# Altium PCB PCB1.PcbDoc
Units mm, origin at the board's own origin, x right, y up, seen from the top; angles counter-clockwise.
Board outline 30.73 x 48.39 mm, 2 copper layers (Top Layer, Bottom Layer); 86 components, 83 nets, 340 pads, 0 vias.
Unrouted connection lines stored in the file: 221.
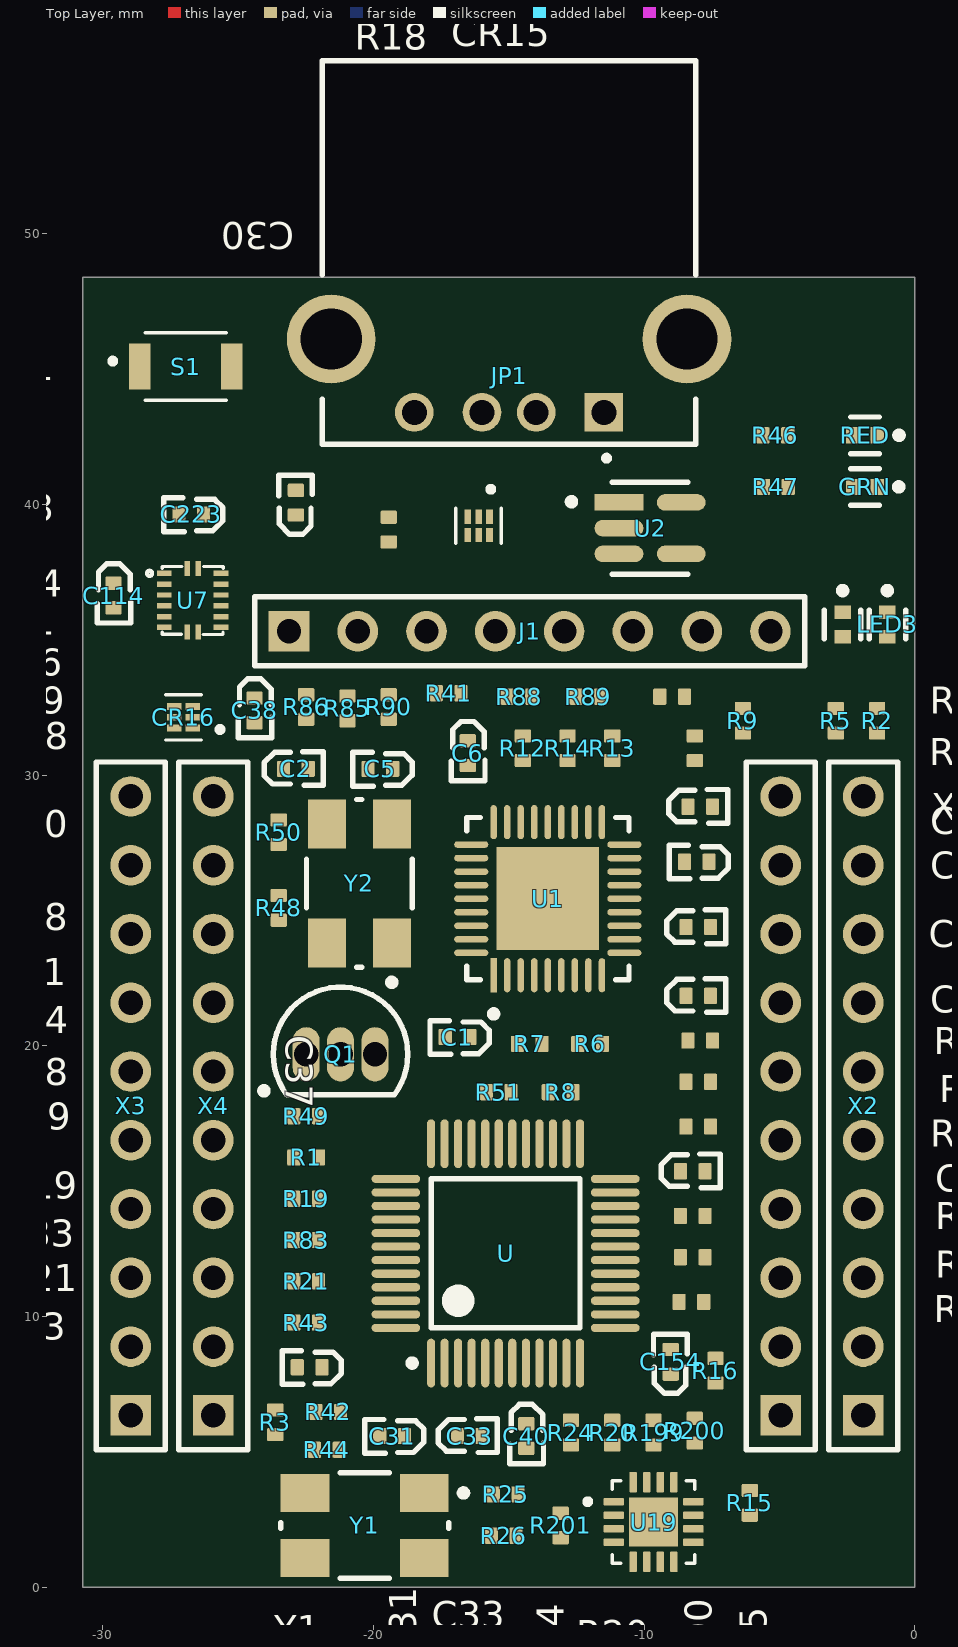
[diagram p0: Top Layer view]
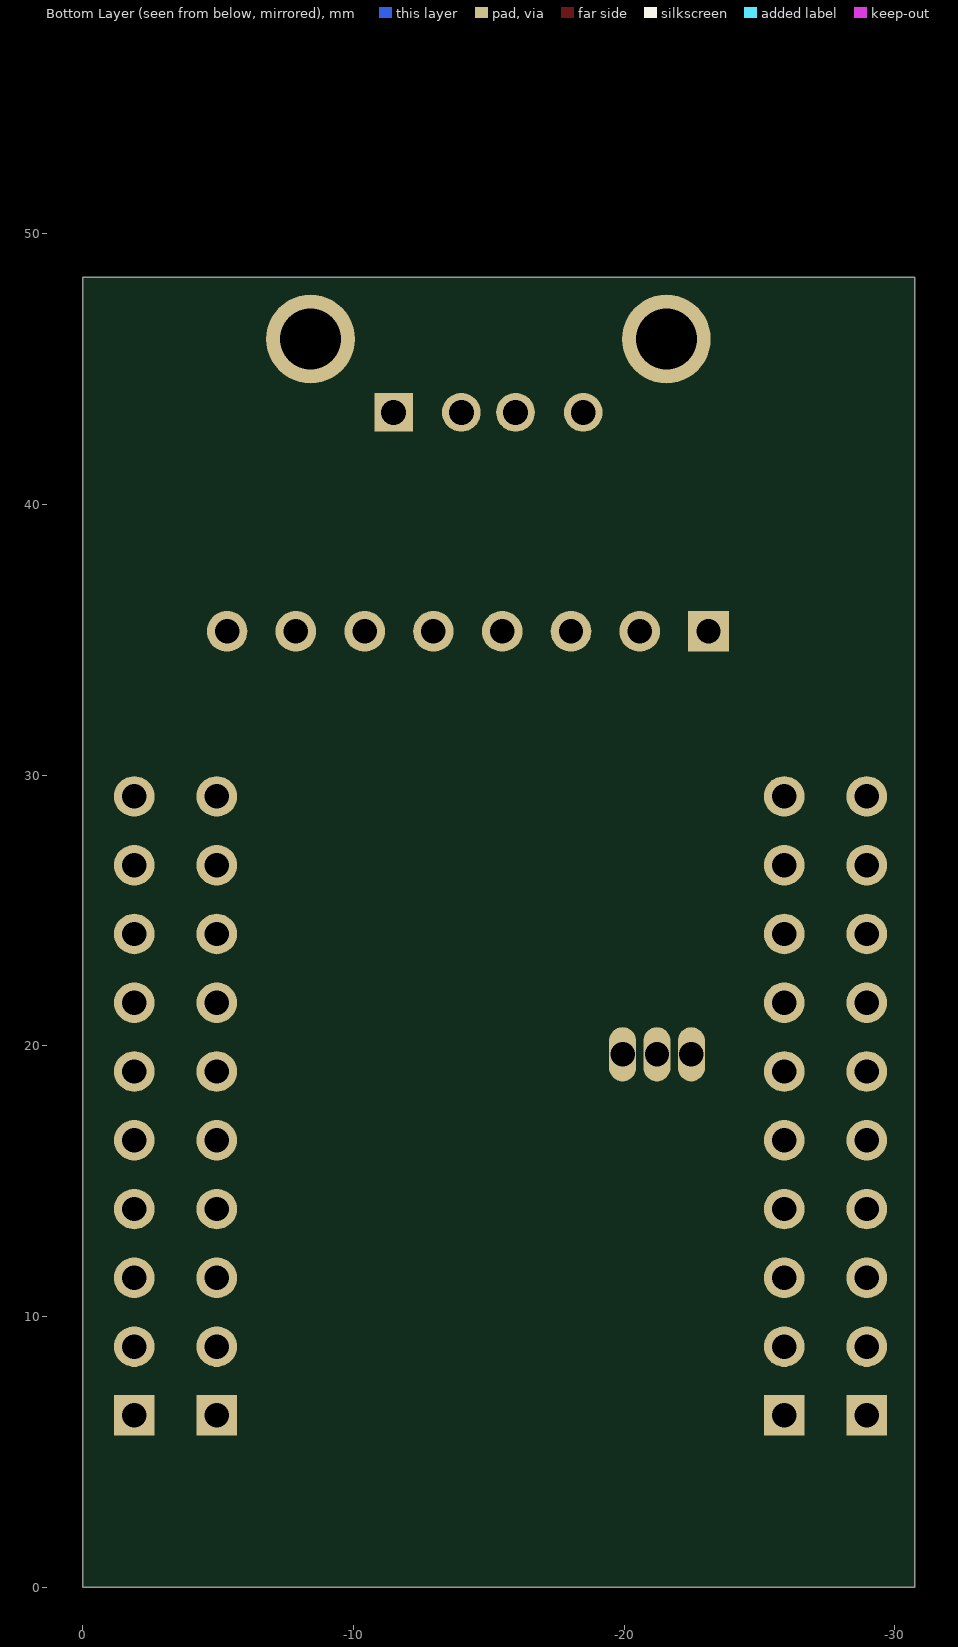
[diagram p1: Bottom Layer view, seen from below]

## Layer stack, top to bottom
Top Solder: solder mask 0.0102, Solder Resist, Dk 3.5
Top Layer: signal copper 0.0356
Dielectric 1: dielectric 0.32, FR-4, Dk 4.8
Bottom Layer: signal copper 0.0356
Bottom Solder: solder mask 0.0102, Solder Resist, Dk 3.5

## Board outline
-30.734,0 -30.734,48.387 0,48.387 0,0

## Design rules (kind name [scope] priority, off if disabled: settings)
Clearance Clearance_1 [All] p1: gap=0.15 ignorepadtopadclearanceinfootprint=FALSE
Clearance [All] p2: gap=0.2 ignorepadtopadclearanceinfootprint=FALSE
PolygonConnect [All] p1: connectstyle=Relief reliefconductorwidth=0.254 reliefentries=4 polygonreliefangle="90 Angle" airgapwidth=0.254
RoutingVias [All] p1: holewidth=0.711 width=1.27 viastyle="Through Hole" minholewidth=0.711 minwidth=1.27 maxholewidth=0.711 maxwidth=1.27
SolderMaskExpansion [All] p1: expansion=0.102 istentingtop=FALSE
Width [All] p1: maxlimit=0.254 minlimit=0.254 preferedwidth=0.254
30 further rules are at their usual default settings.

## Classes and differential pairs
component class Sheet4: C154 R1 R3 R4 R15 R16 R25 R26 R199 R200 R201 U19
component class Sheet3: C1 C2 C3 C4 C5 C6 C7 C8 R7 R9 R10 R11 R12 R13 R14 U1 U2 Y2
component class Sheet2: " " C30 C31 C33 C37 C38 C39 C40 CR16 GRN Q1 R6 R8 R18 R19 R20 R21 R22 R24 R41 R42 R43 R44 R46 R47 R48 R49 R50 R51 R83 R84 R85 R86 R88 R89 R90 R92 RED S1 U Y1
component class Sheet1: C114 C223 CR15 J1 JP1 LED3 LED4 R2 R5 R17 R23 U7 X1 X2 X3 X4

## Components (designator, comment, footprint, x,y, rotation, side; value= is the part's Value field where it differs from the comment)
C1 "Cap" CAPC1005X35N -16.891,20.32 r0 top value=18pF
C2 "Cap" CAPC1005X35N -22.86,30.226 r180 top value=18pF
C3 "Cap" CAPC1005X35N -8.054,26.797 r0 top value=1uF
C4 "Cap" CAPC1005X35N -8.001,21.844 r180 top value=1uF
C5 "Cap" CAPC1005X35N -19.738,30.226 r0 top value=1uF
C6 "Cap" CAPC1005X35N -16.51,30.808 r90 top value=1uF
C7 "Cap" CAPC1005X35N -8.001,24.384 r180 top value=1uF
C8 "Cap" CAPC1005X35N -7.927,28.829 r180 top value=1uF
C30 "Cap" CAPC1005X35N -22.86,40.058 r270 top value=1uF
C31 "Cap" CAPC1005X35N -19.304,5.588 r0 top value=15pF
C33 "Cap" CAPC1005X35N -16.436,5.588 r180 top value=15pF
C37 "Cap" CAPC1005X35N -22.352,8.128 r0 top value=1uF
C38 "Cap" CAPC1005X35N -24.384,32.385 r90 top value=1uF
C39 "Cap" CAPC1005X35N -8.202,15.367 r180 top value=1uF
C40 "Cap" CAPC1005X35N -14.351,5.588 r90 top value=1uF
C114 "6.3V" CAPC1005X35N -29.591,36.629 r90 top value=10uF
C154 "Cap" CAPC1005X35N -9.017,8.329 r270 top value=0.01uF
C223 "6.3V" CAPC1005X35N -26.723,39.624 r0 top value=2.2uF
CR15 "HSP061-2M6" PSON40P120X130X55-6N -16.11,39.202 r270 top
CR16 "HSP061-2M6" PSON40P120X130X55-6N -27.01,32.131 r180 top
GRN "LED2" FP-SML-P11MTT86-MFG -1.847,40.64 r180 top
J1 "8 PIN HDR" HDR1X8 -23.114,35.306 r0 top
JP1 "JP1" GCT_USB1130-15-A_REVA -14.986,46.101 r180 top
LED3 "LED0" FP-SML-P11MTT86-MFG -1.016,35.56 r270 top
LED4 "LED0" FP-SML-P11MTT86-MFG -2.667,35.56 r270 top
Q1 "2N3904" TO-92A -21.209,19.685 r270 top
R1 "Res1" RESC1005X35N -22.479,15.875 r0 top value=0
R2 "Res1" RESC1005X35N -1.397,32.004 r90 top value=110
R3 "Res1" RESC1005X35N -23.622,6.096 r270 top value=0
R4 "Res1" RESC1005X35N -7.927,20.193 r180 top value=0
R5 "Res1" RESC1005X35N -2.921,32.004 r90 top value=110
R6 "Res1" RESC1005X35N -11.991,20.066 r180 top value=0
R7 "Res1" RESC1005X35N -14.224,20.066 r0 top value=12K
R8 "Res1" RESC1005X35N -13.081,18.288 r180 top value=0
R9 "Res1" RESC1005X35N -6.35,32.004 r90 top value=0
R10 "Res1" RESC1005X35N -8.128,30.988 r90 top value=0
R11 "Res1" RESC1005X35N -8.964,32.893 r0 top value=100k
R12 "Res1" RESC1005X35N -14.478,30.988 r90 top value=100k
R13 "Res1" RESC1005X35N -11.176,30.988 r90 top value=100k
R14 "Res1" RESC1005X35N -12.827,30.988 r90 top value=100k
R15 "Res1" RESC1005X35N -6.096,3.122 r270 top value=0
R16 "Res1" RESC1005X35N -7.366,8.001 r270 top value=0
R17 "Res1" RESC1005X35N -8.001,18.669 r180 top value=0
R18 "Res1" RESC1005X35N -19.431,39.063 r90 top value=100k
R19 "Res1" RESC1005X35N -22.479,14.351 r180 top value=2.7K
R20 "Res1" RESC1005X35N -11.176,5.715 r270 top value=4.7K
R21 "Res1" RESC1005X35N -22.479,11.303 r180 top value=0
R22 "Res1" RESC1005X35N -8.202,13.716 r0 top value=1.5K
R23 "Res1" RESC1005X35N -8.001,17.018 r180 top value=0
R24 "Res1" RESC1005X35N -12.7,5.715 r90 top value=4.7K
R25 "Res1" RESC1005X35N -15.113,3.429 r0 top value=10K
R26 "Res1" RESC1005X35N -15.187,1.905 r0 top value=10K
R41 "Res1" RESC1005X35N -17.219,33.02 r180 top value=100
R42 "Res1" RESC1005X35N -21.664,6.477 r180 top value=10K
R43 "Res1" RESC1005X35N -22.479,9.779 r0 top value=100K
R44 "Res1" RESC1005X35N -21.717,5.08 r180 top value=10K
R46 "Res1" RESC1005X35N -5.154,42.545 r180 top value=100
R47 "Res1" RESC1005X35N -5.133,40.64 r180 top value=100
R48 "Res1" RESC1005X35N -23.495,25.093 r270 top value=10K
R49 "Res1" RESC1005X35N -22.479,17.399 r0 top value=100
R50 "Res1" RESC1005X35N -23.495,27.887 r270 top value=33K
R51 "Res1" RESC1005X35N -15.367,18.288 r180 top value=1.5k
R83 "Res1" RESC1005X35N -22.479,12.827 r0 top value=0
R84 "Res1" RESC1005X35N -8.202,12.192 r180 top value=0
R85 "Res1" RESC1005X35N -20.955,32.459 r270 top value=0
R86 "Res1" RESC1005X35N -22.479,32.512 r270 top value=0
R88 "Res1" RESC1005X35N -14.605,32.893 r0 top value=1K
R89 "Res1" RESC1005X35N -12.065,32.893 r180 top value=1K
R90 "Res1" RESC1005X35N -19.431,32.512 r90 top value=1K
R92 "Res1" RESC1005X35N -8.255,10.541 r0 top value=1K
R199 "Res1" RESC1005X35N -9.652,5.715 r90 top value=0
R200 "Res1" RESC1005X35N -8.128,5.789 r90 top value=0
R201 "Res1" RESC1005X35N -13.081,2.286 r270 top value=10K
RED "LED1" FP-SML-P11MTT86-MFG -1.836,42.545 r180 top
S1 "sw" SW_B3U-1000P -26.924,45.085 r0 top
U "STM32F103CBT6" STM-LQFP48_N -15.117,12.333 r90 top
U1 "USB2534I-1080AEN" FP-36SQFN-3706-6x6B-IPC_A -13.556,25.432 r90 top
U2 "usb2" FP-DBV0005A-IPC_A -9.779,39.116 r0 top
U7 "EP5358HUI" QFN40P225X250X110-16N -26.67,36.449 r0 top
U19 "" QFN50P300X300X90-17N -9.652,2.413 r0 top
X1 "SOC 10" HDR1X10 -4.953,6.35 r90 top
X2 "SOC 10" HDR1X10 -1.905,6.35 r90 top
X3 "SOC10" HDR1X10 -28.956,6.35 r90 top
X4 "SOC10" HDR1X10 -25.908,6.35 r90 top
Y1 "cristal" ABRA-ABMM2-4_V -20.32,2.286 r180 top
Y2 "cristal" ABRA-ABMM2-4_V -20.517,25.994 r90 top

## Footprints (in the part's own frame and the unit in brackets; to place one, negate y for a bottom-side part, rotate by r counter-clockwise, add the part's x,y. Pads: shape width x height; smd on the part's side, far side on the other; paste and mask are expansions set on the pad)
ABRA-ABMM2-4_V [mm] "SMD, 4-Leads, Body 6.2x3.9mm, Pitch 4.4mm, Height 1.2mm"
  rect 1.8x1.4 smd: 1(-2.2,-1.2) 2(2.2,-1.2) 3(2.2,1.2) 4(-2.2,1.2)
  silkscreen extent -3.78,-1.95 3.1,1.95, body extent -3.1,-1.95 3.1,1.95, height 1.2
CAPC1005X35N [mm]
  rrect20% 0.49x0.6 smd: 1(-0.455,0) 2(0.455,0)
  silkscreen extent -1.02,-0.64 1.17,0.61
FP-36SQFN-3706-6x6B-IPC_A [mm]
  rect 1.259x0.239 smd paste+0 mask+0: 1(-2.827,2)
  rrect100% 1.259x0.239 smd paste+0 mask+0: 2(-2.827,1.5) 3(-2.827,1) 4(-2.827,0.5) 5(-2.827,0) 6(-2.827,-0.5) 7(-2.827,-1) 8(-2.827,-1.5) 9(-2.827,-2) 19(2.827,-2) 20(2.827,-1.5) 21(2.827,-1) 22(2.827,-0.5) 23(2.827,0) 24(2.827,0.5) 25(2.827,1) 26(2.827,1.5) 27(2.827,2)
  rrect100% 0.239x1.259 smd paste+0 mask+0: 10(-2,-2.827) 11(-1.5,-2.827) 12(-1,-2.827) 13(-0.5,-2.827) 14(0,-2.827) 15(0.5,-2.827) 16(1,-2.827) 17(1.5,-2.827) 18(2,-2.827) 28(2,2.827) 29(1.5,2.827) 30(1,2.827) 31(0.5,2.827) 32(0,2.827) 33(-0.5,2.827) 34(-1,2.827) 35(-1.5,2.827) 36(-2,2.827)
  rect 3.8x3.8 smd paste-1000 mask+0: 37(0,0)
  silkscreen extent -4.38,-3 3,3, body extent -3.96,-3.96 3.96,3.96, height 0.25
FP-DBV0005A-IPC_A [mm]
  rect 1.805x0.612 smd paste+0 mask+0: 1(-1.15,0.95)
  rrect100% 1.805x0.612 smd paste+0 mask+0: 2(-1.15,0) 3(-1.15,-0.95) 4(1.15,-0.95) 5(1.15,0.95)
  silkscreen extent -3.03,-1.7 1.4,1.7, body extent -2.55,-1.95 2.55,1.95, height 0.25
FP-SML-P11MTT86-MFG [mm]
  rect 0.5x0.6 smd paste+0 mask+0: 1(-0.45,0) 2(0.45,0)
  silkscreen extent -1.38,-0.67 0.53,0.67, body extent -0.8,-0.43 0.8,0.43, height 0.25
GCT_USB1130-15-A_REVA [mm]
  rect 1.428x1.428 hole 0.92: 1(-3.5,2.71)
  round 1.428 hole 0.92: 2(-1,2.71) 3(1,2.71) 4(3.5,2.71)
  round 3.276 hole 2.26: S1(-6.57,0) S2(6.57,0)
  silkscreen extent -6.9,-10.28 6.9,4.5
HDR1X8 [mm] "Connector; Header; 8 Position"
  rect 1.5x1.5 hole 0.9: 1(0,0)
  round 1.5 hole 0.9: 2(2.54,0) 3(5.08,0) 4(7.62,0) 5(10.16,0) 6(12.7,0) 7(15.24,0) 8(17.78,0)
  silkscreen extent -1.27,-1.27 19.05,1.27
HDR1X10 [mm] "Connector; Header; 10 Position"
  rect 1.5x1.5 hole 0.9: 1(0,0)
  round 1.5 hole 0.9: 2(2.54,0) 3(5.08,0) 4(7.62,0) 5(10.16,0) 6(12.7,0) 7(15.24,0) 8(17.78,0) 9(20.32,0) 10(22.86,0)
  silkscreen extent -1.27,-1.27 24.13,1.27
PSON40P120X130X55-6N [mm]
  rect 0.53x0.25 smd: 1(-0.34,0.4) 2(-0.34,0) 3(-0.34,-0.4) 4(0.34,-0.4) 5(0.34,0) 6(0.34,0.4)
  silkscreen extent -1.45,-0.84 0.65,0.84
QFN40P225X250X110-16N [mm]
  rect 0.55x0.2 smd: 1(-1.05,1) 2(-1.05,0.6) 3(-1.05,0.2) 4(-1.05,-0.2) 5(-1.05,-0.6) 6(-1.05,-1) 9(1.05,-1) 10(1.05,-0.6) 11(1.05,-0.2) 12(1.05,0.2) 13(1.05,0.6) 14(1.05,1)
  rect 0.2x0.55 smd: 7(-0.2,-1.175) 8(0.2,-1.175) 15(0.2,1.175) 16(-0.2,1.175)
  silkscreen extent -1.68,-1.26 1.13,1.25
QFN50P300X300X90-17N [mm]
  rrect25% 0.76x0.27 smd: 1(-1.47,0.75) 2(-1.47,0.25) 3(-1.47,-0.25) 4(-1.47,-0.75) 9(1.47,-0.75) 10(1.47,-0.25) 11(1.47,0.25) 12(1.47,0.75)
  rrect25% 0.27x0.76 smd: 5(-0.75,-1.47) 6(-0.25,-1.47) 7(0.25,-1.47) 8(0.75,-1.47) 13(0.75,1.47) 14(0.25,1.47) 15(-0.25,1.47) 16(-0.75,1.47)
  rect 1.8x1.8 smd paste-2: 17(0,0)
  silkscreen extent -2.53,-1.53 1.53,1.53, body extent -1.5,-1.5 1.5,1.5, height 0.8
RESC1005X35N [mm]
  rrect20% 0.49x0.6 smd: 1(-0.455,0) 2(0.455,0)
STM-LQFP48_N [mm] "QFP, 48-Leads, Body 7x7mm, Pitch 0.5mm, IPC Medium Density"
  oval 1.8x0.3 smd: 1(-4.05,2.75) 2(-4.05,2.25) 3(-4.05,1.75) 4(-4.05,1.25) 5(-4.05,0.75) 6(-4.05,0.25) 7(-4.05,-0.25) 8(-4.05,-0.75) 9(-4.05,-1.25) 10(-4.05,-1.75) 11(-4.05,-2.25) 12(-4.05,-2.75) 25(4.05,-2.75) 26(4.05,-2.25) 27(4.05,-1.75) 28(4.05,-1.25) 29(4.05,-0.75) 30(4.05,-0.25) 31(4.05,0.25) 32(4.05,0.75) 33(4.05,1.25) 34(4.05,1.75) 35(4.05,2.25) 36(4.05,2.75)
  oval 0.3x1.8 smd: 13(-2.75,-4.05) 14(-2.25,-4.05) 15(-1.75,-4.05) 16(-1.25,-4.05) 17(-0.75,-4.05) 18(-0.25,-4.05) 19(0.25,-4.05) 20(0.75,-4.05) 21(1.25,-4.05) 22(1.75,-4.05) 23(2.25,-4.05) 24(2.75,-4.05) 37(2.75,4.05) 38(2.25,4.05) 39(1.75,4.05) 40(1.25,4.05) 41(0.75,4.05) 42(0.25,4.05) 43(-0.25,4.05) 44(-0.75,4.05) 45(-1.25,4.05) 46(-1.75,4.05) 47(-2.25,4.05) 48(-2.75,4.05)
  silkscreen extent -4.17,-2.75 2.75,3.57, body extent -3.5,-3.5 3.5,3.5, height 1.6
SW_B3U-1000P [mm]
  rect 0.8x1.7 smd: 1(-1.7,0) 2(1.7,0)
  silkscreen extent -2.8,-1.25 1.5,1.25, body extent -2,-1.25 2,1.25, height 1.75
TO-92A [mm] "TO, Flat Index; 3 In-Line, Axial Leads; Body Dia. 4.5mm; Leads 0.51 x 0.48 mm (max)"
  oval 2x1 hole 0.9: 1(0,-1.27) 2(0,0) 3(0,1.27)
  silkscreen extent -2.48,-2.95 1.5,2.48, body extent -2.48,-2.5 1.5,2.5, height 6.86

## Part data
C1 C2 C3 C4 C5 C6 C7 C8 C30 C31 C33 C37 C38 C39 C40 C154: "Capacitor", LatestRevisionDate=17-Jul-2002, LatestRevisionNote="Re-released for DXP Platform.", PackageDescription="Radial Cap, Thru-Hole; 2 Leads; 0.3 in Pin Spacing", PackageReference=RAD-0.3, Published=8-Jun-2000, Publisher="Altium Limited"
C114 C223: library part Cap, "Capacitor", LatestRevisionDate=17-Jul-2002, LatestRevisionNote="Re-released for DXP Platform.", PackageDescription="Radial Cap, Thru-Hole; 2 Leads; 0.3 in Pin Spacing", PackageReference=RAD-0.3, Published=8-Jun-2000, Publisher="Altium Limited"
GRN RED: library part LED0, "Typical INFRARED GaAs LED", LatestRevisionDate=08-Jul-2005, LatestRevisionNote="Mech Layer 1 removed.", PackageDescription="LED; 2 Leads", PackageReference=LED-0, Published=8-Jun-2000, Publisher="Altium Limited"
J1: library part "Header 8", "Header, 8-Pin", LatestRevisionDate=17-Jul-2002, LatestRevisionNote="Re-released for DXP Platform.", Publisher="Altium Limited"
JP1: library part USB1130-15-A_REVA, Package=None, Availability=Unavailable, Check_prices=https://www.snapeda.com/parts/USB1130-15-A/Global%20Connector%20Technology/view-part/5160678/?ref=eda, MF="Global Connector Technology", MP=USB1130-15-A, Price=None, SnapEDA_Link=https://www.snapeda.com/parts/USB1130-15-A/Global%20Connector%20Technology/view-part/5160678/?ref=snap
LED3 LED4: "Typical INFRARED GaAs LED", LatestRevisionDate=08-Jul-2005, LatestRevisionNote="Mech Layer 1 removed.", PackageDescription="LED; 2 Leads", PackageReference=LED-0, Published=8-Jun-2000, Publisher="Altium Limited"
Q1: "NPN General Purpose Amplifier", ComponentLink1Description="Manufacturer Link", ComponentLink1URL=http://www.fairchildsemi.com/, ComponentLink2Description=Datasheet, ComponentLink2URL=http://www.fairchildsemi.com/ds/2N%2F2N3904.pdf, DatasheetVersion=1997, LatestRevisionDate=15-Jan-2003, LatestRevisionNote="PCB Footprint 'BCY-W3/D4.7' replaced", PackageDescription="TO, Flat Index; 3 In-Line, Axial Leads; Body Dia. 4.5mm; Leads 0.51 x 0.48 mm (max)", PackageReference=TO-92A, PackageVersion=Sep-1998, Published=8-Jun-2000, Publisher="Altium Limited"
R1 R2 R3 R4 R5 R6 R7 R8 R9 R10 R11 R12 R13 R14 R15 R16 R17 R18 R19 R20 R21 R22 R23 R24 R25 R26 R41 R42 R43 R44 R46 R47 R48 R49 R50 R51 R83 R84 R85 R86 R88 R89 R90 R92 R199 R200 R201: "Resistor", LatestRevisionDate=17-Jul-2002, LatestRevisionNote="Re-released for DXP Platform.", PackageDescription="Axial Device, Thru-Hole; 2 Leads; 0.3 in Pin Spacing", PackageReference=AXIAL-0.3, Published=8-Jun-2000, Publisher="Altium Limited"
U: "ARMÂ® CortexÂ®-M3 STM32F1 Microcontroller IC 32-Bit 72MHz 128KB _128K x 8_ FLASH", Package="LQFP-48 STMicroelectronics", Availability=Unavailable, MF=STMicroelectronics, MP=STM32F103CBT6, Price=None, SnapEDA_Link=https://www.snapeda.com/parts/STM32F103CBT6/STMicroelectronics/view-part/38865/?ref=snap
U1: library part CMP-06284-000029-1, "IC USB 2.0 HUB CTLR 4PORT 36SQFN", Manufacturer=Microchip, Max Operating Temperature=85°C, Max Supply Voltage=3.6V, Min Operating Temperature=-40°C, Min Supply Voltage=3V, Operating Supply Voltage=3.3V, Package Quantity=490, ESD Protection=Yes, Height=0.95mm, Interface=I2C, Lead Free="Lead Free", Length=6.1mm, Manufacturer Part Number=USB2534I-1080AEN, Mount="Surface Mount", Number of Channels=4, Number of Pins=36, Number of Ports=4, Number of Transceivers=1, Packaging=Tray, Radiation Hardening=No, REACH SVHC="No SVHC", RoHS Compliant=Yes, Width=6.1mm
U7: "Non-Isolated PoL Module DC DC Converter 1 Output 1.8 ~ 3.3V 600mA 2.4V - 5.5V Input", Package="PowerTFQFN-16 Altera", Check_prices=https://www.snapeda.com/parts/EP5358HUI/Intel/view-part/324506/?ref=eda, Digi-Key_Part_Number=544-2870-1-ND, MF=Intel, MP=EP5358HUI, Purchase-URL=https://pricing.snapeda.com/search/part/EP5358HUI/?ref=eda, SnapEDA_Link=https://www.snapeda.com/parts/EP5358HUI/Intel/view-part/324506/?ref=snap
U19: library part XR21V1410
X1 X2 X3 X4: library part "Header 10", "Header, 10-Pin", LatestRevisionDate=17-Jul-2002, LatestRevisionNote="Re-released for DXP Platform.", Publisher="Altium Limited"

## Nets (pads, with @x,y where several pads share a name; then routed paths per layer and width w, separated by ;. In a path a pad name is that pad's centre, name@x,y a point inside that pad or via, vN(x,y) a via of type N, cw(c..) or ccw(c..) an arc to the next point about the centre after c; other vN are vias at no path point)
"CTS X": R1.1 X3.2 X4.2
D08: X1.4 X2.4
DIN: R10.1 R15.1 X1.3 X2.3
DIO0: X3.10 X4.10
DIO1: X3.9 X4.9
DIO2: X3.8 X4.8
DIO3: X3.7 X4.7
DIO4: X3.1 X4.1
DIO5: X3.5 X4.5
DM: R6.2 U.32
DOUT: R9.1 R16.1 X1.2 X2.2
DP: R8.2 R51.1 U.33
"DTR X": R4.1 R17.1 X1.9 X2.9
GND: C1.2 C2.2 C3.2 C4.1 C5.1 C6.1 C7.1 C8.1 C30.1 C31.1 C33.2 C37.1 C38.1 C39.1 C40.1 C114.1 C154.2 C223.1 CR15.2 CR16.2 J1.2 JP1.4 JP1.S1 JP1.S2 LED3.2 LED4.2 R7.1 R11.1 R12.2 R13.1 R14.1 R21.1 R24.1 R42.2 R43.1 R44.2 R50.1 R84.1 R201.1 RED.2 S1.2 U1.37 U2.2 U7.2 U7.3 U7.6 U7.9 U7.10 U7.11 U19.1 U19.13 U19.17 U.8 U.20 U.23 U.35 U.47 X1.10 X2.10 Y1.2 Y1.4 Y2.2 Y2.4
MAIN_DM: U1.1 U1.30
MAIN_DP: U1.2 U1.31
"MBED RST": R92.1 U.18
"MBED TCK": R89.1 U.15 U.26
"MBED TMS": R41.1 R88.1 U.25
MBED_DM: CR15.4 R6.1
MBED_DP: CR15.6 R8.1
MBED_TDO: R90.1 U.31
MDOT_DM: R23.2 U1.7
MDOT_DP: R17.2 U1.6
NetC1_1: C1.1 U1.33 Y2.1
NetC2_1: C2.1 U1.32 Y2.3
NetC3_1: C3.1 U1.14
NetC31_2: C31.2 U.5 Y1.1
NetC33_1: C33.1 U.6 Y1.3
NetCR16_1: CR16.1 U.37
NetCR16_3: CR16.3 U.34
NetGRN_2: GRN.2 R47.1
NetJ1_7: J1.7 R85.1
NetJ1_8: J1.8 R86.1
NetLED3_1: LED3.1 R2.2
NetLED4_1: LED4.1 R5.2
NetQ1_1: Q1.1 R51.2
NetQ1_2: Q1.2 R48.1 R49.1 R50.2
NetR1_2: R1.2 U19.3
NetR3_2: R3.2 R201.2 U19.4
NetR4_2: R4.2 U19.5
NetR7_2: R7.2 U1.35
NetR9_2: R9.2 U1.19
NetR10_2: R10.2 U1.21
NetR11_2: R11.2 U1.22
NetR12_1: R12.1 U1.28
NetR13_2: R13.2 U1.24
NetR14_2: R14.2 U1.25
NetR15_2: R15.2 U19.9
NetR16_2: R16.2 U19.10
NetR19_1: R19.1 R21.2 R83.1 U.39
NetR20_1: R20.1 R24.2 U.10
NetR22_1: R22.1 R84.2 U.21
NetR25_2: R25.2 U19.12
NetR26_2: R26.2 U19.11
NetR42_1: R42.1 U.2
NetR43_2: R43.2 U.44
NetR44_1: R44.1 U.3
NetR46_1: R46.1 RED.1
NetR46_2: R46.2 R47.2 U.30
NetR49_2: R49.2 U.38
NetR199_1: R199.1 U19.15
NetR200_1: R200.1 U19.14
NRST: U1.26 U2.1 U.7
"ON SLEEP": X3.3 X4.3
PWM1: X1.7 X2.7
RESERVED1: R23.1 X1.8 X2.8
RESERVED2: X3.4 X4.4
RESET: C30.2 J1.5 R18.1 R92.2 S1.1 X1.5 X2.5
RSSI: R5.1 X1.6 X2.6
"RTS X": R3.1 X3.6 X4.6
STLINK_RX: R85.2 U.12
STLINK_TX: R86.2 U.13
SWCLK: CR16.6 J1.3 R89.2
SWDIO: CR16.4 J1.4 R88.2
SWO: J1.6 R90.2
"T SWDIO IN": R41.2 U.27
USB5V: C223.2 CR15.5 JP1.1 R19.2 R48.2 U7.12 U7.13 U7.14
USB_IN_DM: CR15.3 JP1.2
USB_IN_DP: CR15.1 JP1.3
VDD3_3: C4.2 C5.2 C6.2 C7.2 C8.2 C37.2 C38.2 C39.2 C40.2 C114.2 C154.1 CR16.5 GRN.1 J1.1 Q1.3 R2.1 R18.2 R20.2 R22.2 R25.1 R26.1 R83.2 U1.10 U1.15 U1.23 U1.27 U1.29 U1.36 U2.5 U7.5 U7.7 U7.8 U19.16 U.1 U.9 U.24 U.36 U.48 X1.1 X2.1
XBEE_DM: R200.2 U1.3
XBEE_DP: R199.2 U1.4
pads on no net: U1.5 U1.8 U1.9 U1.11 U1.12 U1.13 U1.16 U1.17 U1.18 U1.20 U1.34 U2.3 U2.4 U7.1 U7.4 U7.15 U7.16 U19.2 U19.6 U19.7 U19.8 U.4 U.11 U.14 U.16 U.17 U.19 U.22 U.28 U.29 U.40 U.41 U.42 U.43 U.45 U.46